# EAGLE board WiFiLedBoard_multi (EAGLE 6.1)
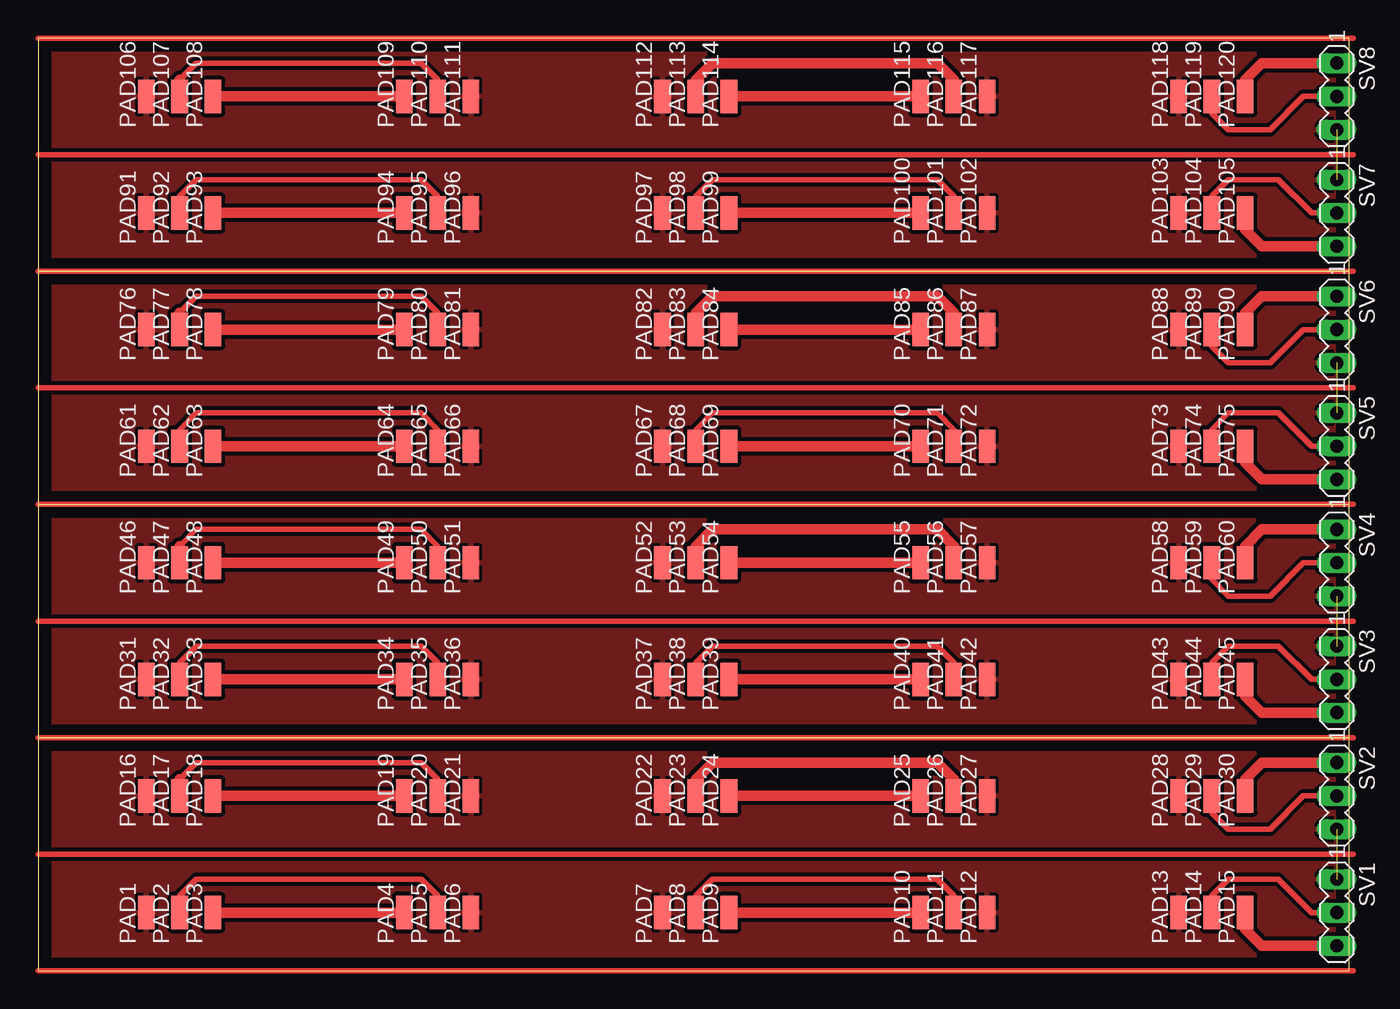
[diagram p0: board, top side]

Size 100 x 71.11 mm. Coordinates in mm from the lower left corner, seen from the top.
Outline: 0,0 100,0 100,17.77 0,17.77 0,0
Outline: 0,17.78 100,17.78 100,35.55 0,35.55 0,17.78
Outline: 0,35.56 100,35.56 100,53.33 0,53.33 0,35.56
Outline: 0,53.34 100,53.34 100,71.11 0,71.11 0,53.34
Copper layers (1*16): Top 0.035mm / dielectric 1.5mm / Bottom 0.035mm
Design rules: minimum track width 10mil, minimum drill 24mil, track to track 12mil, track to pad 12mil, pad to pad 8mil, via to via 8mil, smd to smd 8mil, copper to edge 40mil, drill to drill 8mil, minimum pad ring 10mil, minimum via ring 8mil, stop-mask expansion 4mil, vias tented up to drill 0mil, thermal gap 10mil

## Footprints (pad centres in the part's own frame; a part is rotated, then mirrored left to right if it is on the bottom)
SMD1,27-2,54 = smd 1.27 x 2.54: 1 0,0
MA03-1 = drill 1.016 long: 1 -2.54,0; 2 0,0; 3 2.54,0

## Placement (x,y rotation side)
PAD1  [SMD1,27-2,54]  8.26,4.45 0 top
PAD2  [SMD1,27-2,54]  10.79,4.45 0 top
PAD3  [SMD1,27-2,54]  13.34,4.45 0 top
PAD4  [SMD1,27-2,54]  27.94,4.45 0 top
PAD5  [SMD1,27-2,54]  30.48,4.45 0 top
PAD6  [SMD1,27-2,54]  33.02,4.45 0 top
PAD7  [SMD1,27-2,54]  47.62,4.45 0 top
PAD8  [SMD1,27-2,54]  50.16,4.45 0 top
PAD9  [SMD1,27-2,54]  52.7,4.45 0 top
PAD10  [SMD1,27-2,54]  67.31,4.45 0 top
PAD11  [SMD1,27-2,54]  69.85,4.45 0 top
PAD12  [SMD1,27-2,54]  72.39,4.45 0 top
PAD13  [SMD1,27-2,54]  87,4.45 0 top
PAD14  [SMD1,27-2,54]  89.53,4.45 0 top
PAD15  [SMD1,27-2,54]  92.08,4.45 0 top
PAD16  [SMD1,27-2,54]  8.26,13.34 0 top
PAD17  [SMD1,27-2,54]  10.79,13.34 0 top
PAD18  [SMD1,27-2,54]  13.34,13.34 0 top
PAD19  [SMD1,27-2,54]  27.94,13.34 0 top
PAD20  [SMD1,27-2,54]  30.48,13.34 0 top
PAD21  [SMD1,27-2,54]  33.02,13.34 0 top
PAD22  [SMD1,27-2,54]  47.62,13.34 0 top
PAD23  [SMD1,27-2,54]  50.16,13.34 0 top
PAD24  [SMD1,27-2,54]  52.7,13.34 0 top
PAD25  [SMD1,27-2,54]  67.31,13.34 0 top
PAD26  [SMD1,27-2,54]  69.85,13.34 0 top
PAD27  [SMD1,27-2,54]  72.39,13.34 0 top
PAD28  [SMD1,27-2,54]  87,13.34 0 top
PAD29  [SMD1,27-2,54]  89.53,13.34 0 top
PAD30  [SMD1,27-2,54]  92.08,13.34 0 top
PAD31  [SMD1,27-2,54]  8.26,22.23 0 top
PAD32  [SMD1,27-2,54]  10.79,22.23 0 top
PAD33  [SMD1,27-2,54]  13.34,22.23 0 top
PAD34  [SMD1,27-2,54]  27.94,22.23 0 top
PAD35  [SMD1,27-2,54]  30.48,22.23 0 top
PAD36  [SMD1,27-2,54]  33.02,22.23 0 top
PAD37  [SMD1,27-2,54]  47.62,22.23 0 top
PAD38  [SMD1,27-2,54]  50.16,22.23 0 top
PAD39  [SMD1,27-2,54]  52.7,22.23 0 top
PAD40  [SMD1,27-2,54]  67.31,22.23 0 top
PAD41  [SMD1,27-2,54]  69.85,22.23 0 top
PAD42  [SMD1,27-2,54]  72.39,22.23 0 top
PAD43  [SMD1,27-2,54]  87,22.23 0 top
PAD44  [SMD1,27-2,54]  89.53,22.23 0 top
PAD45  [SMD1,27-2,54]  92.08,22.23 0 top
PAD46  [SMD1,27-2,54]  8.26,31.11 0 top
PAD47  [SMD1,27-2,54]  10.79,31.11 0 top
PAD48  [SMD1,27-2,54]  13.34,31.11 0 top
PAD49  [SMD1,27-2,54]  27.94,31.11 0 top
PAD50  [SMD1,27-2,54]  30.48,31.11 0 top
PAD51  [SMD1,27-2,54]  33.02,31.11 0 top
PAD52  [SMD1,27-2,54]  47.62,31.11 0 top
PAD53  [SMD1,27-2,54]  50.16,31.11 0 top
PAD54  [SMD1,27-2,54]  52.7,31.11 0 top
PAD55  [SMD1,27-2,54]  67.31,31.11 0 top
PAD56  [SMD1,27-2,54]  69.85,31.11 0 top
PAD57  [SMD1,27-2,54]  72.39,31.11 0 top
PAD58  [SMD1,27-2,54]  87,31.11 0 top
PAD59  [SMD1,27-2,54]  89.53,31.11 0 top
PAD60  [SMD1,27-2,54]  92.08,31.11 0 top
PAD61  [SMD1,27-2,54]  8.26,40.01 0 top
PAD62  [SMD1,27-2,54]  10.79,40.01 0 top
PAD63  [SMD1,27-2,54]  13.34,40.01 0 top
PAD64  [SMD1,27-2,54]  27.94,40.01 0 top
PAD65  [SMD1,27-2,54]  30.48,40.01 0 top
PAD66  [SMD1,27-2,54]  33.02,40.01 0 top
PAD67  [SMD1,27-2,54]  47.62,40.01 0 top
PAD68  [SMD1,27-2,54]  50.16,40.01 0 top
PAD69  [SMD1,27-2,54]  52.7,40.01 0 top
PAD70  [SMD1,27-2,54]  67.31,40.01 0 top
PAD71  [SMD1,27-2,54]  69.85,40.01 0 top
PAD72  [SMD1,27-2,54]  72.39,40.01 0 top
PAD73  [SMD1,27-2,54]  87,40.01 0 top
PAD74  [SMD1,27-2,54]  89.53,40.01 0 top
PAD75  [SMD1,27-2,54]  92.08,40.01 0 top
PAD76  [SMD1,27-2,54]  8.26,48.9 0 top
PAD77  [SMD1,27-2,54]  10.79,48.9 0 top
PAD78  [SMD1,27-2,54]  13.34,48.9 0 top
PAD79  [SMD1,27-2,54]  27.94,48.9 0 top
PAD80  [SMD1,27-2,54]  30.48,48.9 0 top
PAD81  [SMD1,27-2,54]  33.02,48.9 0 top
PAD82  [SMD1,27-2,54]  47.62,48.9 0 top
PAD83  [SMD1,27-2,54]  50.16,48.9 0 top
PAD84  [SMD1,27-2,54]  52.7,48.9 0 top
PAD85  [SMD1,27-2,54]  67.31,48.9 0 top
PAD86  [SMD1,27-2,54]  69.85,48.9 0 top
PAD87  [SMD1,27-2,54]  72.39,48.9 0 top
PAD88  [SMD1,27-2,54]  87,48.9 0 top
PAD89  [SMD1,27-2,54]  89.53,48.9 0 top
PAD90  [SMD1,27-2,54]  92.08,48.9 0 top
PAD91  [SMD1,27-2,54]  8.26,57.78 0 top
PAD92  [SMD1,27-2,54]  10.79,57.78 0 top
PAD93  [SMD1,27-2,54]  13.34,57.78 0 top
PAD94  [SMD1,27-2,54]  27.94,57.78 0 top
PAD95  [SMD1,27-2,54]  30.48,57.78 0 top
PAD96  [SMD1,27-2,54]  33.02,57.78 0 top
PAD97  [SMD1,27-2,54]  47.62,57.78 0 top
PAD98  [SMD1,27-2,54]  50.16,57.78 0 top
PAD99  [SMD1,27-2,54]  52.7,57.78 0 top
PAD100  [SMD1,27-2,54]  67.31,57.78 0 top
PAD101  [SMD1,27-2,54]  69.85,57.78 0 top
PAD102  [SMD1,27-2,54]  72.39,57.78 0 top
PAD103  [SMD1,27-2,54]  87,57.78 0 top
PAD104  [SMD1,27-2,54]  89.53,57.78 0 top
PAD105  [SMD1,27-2,54]  92.08,57.78 0 top
PAD106  [SMD1,27-2,54]  8.26,66.67 0 top
PAD107  [SMD1,27-2,54]  10.79,66.67 0 top
PAD108  [SMD1,27-2,54]  13.34,66.67 0 top
PAD109  [SMD1,27-2,54]  27.94,66.67 0 top
PAD110  [SMD1,27-2,54]  30.48,66.67 0 top
PAD111  [SMD1,27-2,54]  33.02,66.67 0 top
PAD112  [SMD1,27-2,54]  47.62,66.67 0 top
PAD113  [SMD1,27-2,54]  50.16,66.67 0 top
PAD114  [SMD1,27-2,54]  52.7,66.67 0 top
PAD115  [SMD1,27-2,54]  67.31,66.67 0 top
PAD116  [SMD1,27-2,54]  69.85,66.67 0 top
PAD117  [SMD1,27-2,54]  72.39,66.67 0 top
PAD118  [SMD1,27-2,54]  87,66.67 0 top
PAD119  [SMD1,27-2,54]  89.53,66.67 0 top
PAD120  [SMD1,27-2,54]  92.08,66.67 0 top
SV1  [MA03-1]  99.06,4.45 270 top
SV2  [MA03-1]  99.06,13.34 270 top
SV3  [MA03-1]  99.06,22.23 270 top
SV4  [MA03-1]  99.06,31.11 270 top
SV5  [MA03-1]  99.06,40.01 270 top
SV6  [MA03-1]  99.06,48.9 270 top
SV7  [MA03-1]  99.06,57.78 270 top
SV8  [MA03-1]  99.06,66.67 270 top

## Library data of the parts
PAD1-PAD120 = wirepad
SV1-SV8 = con-lstb; OC_FARNELL: unknown; OC_NEWARK: unknown

## Nets
GND: PAD1.1 PAD6.1 PAD7.1 PAD12.1 PAD13.1 PAD16.1 PAD21.1 PAD22.1 PAD27.1 PAD28.1 SV1.1 SV2.3
GND1: PAD31.1 PAD36.1 PAD37.1 PAD42.1 PAD43.1 PAD46.1 PAD51.1 PAD52.1 PAD57.1 PAD58.1 SV3.1 SV4.3
GND2: PAD61.1 PAD66.1 PAD67.1 PAD72.1 PAD73.1 PAD76.1 PAD81.1 PAD82.1 PAD87.1 PAD88.1 SV5.1 SV6.3
GND3: PAD91.1 PAD96.1 PAD97.1 PAD102.1 PAD103.1 PAD106.1 PAD111.1 PAD112.1 PAD117.1 PAD118.1 SV7.1 SV8.3
N$1: PAD3.1 PAD4.1
N$2: PAD2.1 PAD5.1
N$4: PAD9.1 PAD10.1
N$5: PAD8.1 PAD11.1
N$7: PAD14.1 SV1.2
N$8: PAD29.1 SV2.2
N$9: PAD30.1 SV2.1
N$10: PAD18.1 PAD19.1
N$11: PAD17.1 PAD20.1
N$12: PAD33.1 PAD34.1
N$13: PAD24.1 PAD25.1
N$14: PAD23.1 PAD26.1
N$15: PAD32.1 PAD35.1
N$16: PAD39.1 PAD40.1
N$17: PAD15.1 SV1.3
N$18: PAD38.1 PAD41.1
N$20: PAD48.1 PAD49.1
N$21: PAD47.1 PAD50.1
N$22: PAD54.1 PAD55.1
N$23: PAD53.1 PAD56.1
N$24: PAD44.1 SV3.2
N$25: PAD59.1 SV4.2
N$26: PAD60.1 SV4.1
N$27: PAD45.1 SV3.3
N$31: PAD63.1 PAD64.1
N$32: PAD62.1 PAD65.1
N$33: PAD69.1 PAD70.1
N$34: PAD68.1 PAD71.1
N$35: PAD78.1 PAD79.1
N$36: PAD77.1 PAD80.1
N$37: PAD84.1 PAD85.1
N$38: PAD83.1 PAD86.1
N$39: PAD74.1 SV5.2
N$40: PAD89.1 SV6.2
N$41: PAD90.1 SV6.1
N$42: PAD75.1 SV5.3
N$46: PAD93.1 PAD94.1
N$47: PAD92.1 PAD95.1
N$48: PAD99.1 PAD100.1
N$49: PAD98.1 PAD101.1
N$50: PAD108.1 PAD109.1
N$51: PAD107.1 PAD110.1
N$52: PAD114.1 PAD115.1
N$53: PAD113.1 PAD116.1
N$54: PAD104.1 SV7.2
N$55: PAD119.1 SV8.2
N$56: PAD120.1 SV8.1
N$57: PAD105.1 SV7.3

## Tracks (layer width: path | path; a pad name or v marks a point on that pad's centre or on a via)
GND  (1 unrouted)
  pour Top: 0,17.78 0,0 100.33,0 100.33,17.78
GND1  (1 unrouted)
  pour Top: 0,35.56 0,17.78 100.33,17.78 100.33,35.56
GND2  (1 unrouted)
  pour Top: 0,53.34 0,35.56 100.33,35.56 100.33,53.34
GND3  (1 unrouted)
  pour Top: 0,71.12 0,53.34 100.33,53.34 100.33,71.12
N$1
  Top 0.813: PAD3.1 PAD4.1
N$2
  Top 0.406: PAD2.1 10.79,5.71 12.06,6.99 29.21,6.99 30.48,5.71 PAD5.1
N$3
  Top 0.406: 0,17.78 100.33,17.78
N$4
  Top 0.813: PAD9.1 PAD10.1
N$5
  Top 0.406: PAD8.1 50.16,5.71 51.44,6.99 68.58,6.99 69.85,5.71 PAD11.1
N$6
  Top 0.406: 0,0 100.33,0
N$7
  Top 0.406: PAD14.1 89.53,5.71 90.81,6.99 94.61,6.99 97.16,4.45 SV1.2
N$8
  Top 0.406: PAD29.1 89.53,12.06 90.81,10.79 93.98,10.79 96.52,13.34 SV2.2
N$9
  Top 0.406: PAD30.1 92.08,14.61
  Top 0.813: 92.08,14.61 93.34,15.88 SV2.1
N$10
  Top 0.813: PAD18.1 PAD19.1
N$11
  Top 0.406: 10.79,14.61 12.06,15.88 29.21,15.88 30.48,14.61 PAD20.1
  Top 0.813: PAD17.1 10.79,14.61
N$12
  Top 0.813: PAD33.1 PAD34.1
N$13
  Top 0.813: PAD24.1 PAD25.1
N$14
  Top 0.406: PAD23.1 50.16,14.61 | 69.85,14.61 PAD26.1
  Top 0.813: 50.16,14.61 51.44,15.88 68.58,15.88 69.85,14.61
N$15
  Top 0.406: PAD32.1 10.79,23.5 12.06,24.77 29.21,24.77 30.48,23.5 PAD35.1
N$16
  Top 0.813: PAD39.1 PAD40.1
N$17
  Top 0.406: 92.08,3.17 PAD15.1
  Top 0.813: SV1.3 93.34,1.91 92.08,3.17
N$18
  Top 0.406: PAD38.1 50.16,23.5 51.44,24.77 68.58,24.77 69.85,23.5 PAD41.1
N$19
  Top 0.406: 0,8.89 100.33,8.89
N$20
  Top 0.813: PAD48.1 PAD49.1
N$21
  Top 0.406: 10.79,32.38 12.06,33.66 29.21,33.66 30.48,32.38 PAD50.1
  Top 0.813: PAD47.1 10.79,32.38
N$22
  Top 0.813: PAD54.1 PAD55.1
N$23
  Top 0.406: PAD53.1 50.16,32.38 | 69.85,32.38 PAD56.1
  Top 0.813: 50.16,32.38 51.44,33.66 68.58,33.66 69.85,32.38
N$24
  Top 0.406: PAD44.1 89.53,23.5 90.81,24.77 94.61,24.77 97.16,22.23 SV3.2
N$25
  Top 0.406: PAD59.1 89.53,29.84 90.81,28.57 93.98,28.57 96.52,31.11 SV4.2
N$26
  Top 0.406: PAD60.1 92.08,32.38
  Top 0.813: 92.08,32.38 93.34,33.66 SV4.1
N$27
  Top 0.406: 92.08,20.95 PAD45.1
  Top 0.813: SV3.3 93.34,19.68 92.08,20.95
N$28
  Top 0.406: 0,26.67 100.33,26.67
N$29
  Top 0.406: 0,35.56 100.33,35.56
N$30
  Top 0.406: 0,17.78 100.33,17.78
N$31
  Top 0.813: PAD63.1 PAD64.1
N$32
  Top 0.406: PAD62.1 10.79,41.27 12.06,42.55 29.21,42.55 30.48,41.27 PAD65.1
N$33
  Top 0.813: PAD69.1 PAD70.1
N$34
  Top 0.406: PAD68.1 50.16,41.27 51.44,42.55 68.58,42.55 69.85,41.27 PAD71.1
N$35
  Top 0.813: PAD78.1 PAD79.1
N$36
  Top 0.406: 10.79,50.16 12.06,51.44 29.21,51.44 30.48,50.16 PAD80.1
  Top 0.813: PAD77.1 10.79,50.16
N$37
  Top 0.813: PAD84.1 PAD85.1
N$38
  Top 0.406: PAD83.1 50.16,50.16 | 69.85,50.16 PAD86.1
  Top 0.813: 50.16,50.16 51.44,51.44 68.58,51.44 69.85,50.16
N$39
  Top 0.406: PAD74.1 89.53,41.27 90.81,42.55 94.61,42.55 97.16,40.01 SV5.2
N$40
  Top 0.406: PAD89.1 89.53,47.62 90.81,46.35 93.98,46.35 96.52,48.9 SV6.2
N$41
  Top 0.406: PAD90.1 92.08,50.16
  Top 0.813: 92.08,50.16 93.34,51.44 SV6.1
N$42
  Top 0.406: 92.08,38.73 PAD75.1
  Top 0.813: SV5.3 93.34,37.47 92.08,38.73
N$43
  Top 0.406: 0,44.45 100.33,44.45
N$44
  Top 0.406: 0,53.34 100.33,53.34
N$45
  Top 0.406: 0,35.56 100.33,35.56
N$46
  Top 0.813: PAD93.1 PAD94.1
N$47
  Top 0.406: PAD92.1 10.79,59.05 12.06,60.33 29.21,60.33 30.48,59.05 PAD95.1
N$48
  Top 0.813: PAD99.1 PAD100.1
N$49
  Top 0.406: PAD98.1 50.16,59.05 51.44,60.33 68.58,60.33 69.85,59.05 PAD101.1
N$50
  Top 0.813: PAD108.1 PAD109.1
N$51
  Top 0.406: 10.79,67.94 12.06,69.22 29.21,69.22 30.48,67.94 PAD110.1
  Top 0.813: PAD107.1 10.79,67.94
N$52
  Top 0.813: PAD114.1 PAD115.1
N$53
  Top 0.406: PAD113.1 50.16,67.94 | 69.85,67.94 PAD116.1
  Top 0.813: 50.16,67.94 51.44,69.22 68.58,69.22 69.85,67.94
N$54
  Top 0.406: PAD104.1 89.53,59.05 90.81,60.33 94.61,60.33 97.16,57.78 SV7.2
N$55
  Top 0.406: PAD119.1 89.53,65.41 90.81,64.14 93.98,64.14 96.52,66.67 SV8.2
N$56
  Top 0.406: PAD120.1 92.08,67.94
  Top 0.813: 92.08,67.94 93.34,69.22 SV8.1
N$57
  Top 0.406: 92.08,56.52 PAD105.1
  Top 0.813: SV7.3 93.34,55.24 92.08,56.52
N$58
  Top 0.406: 0,62.23 100.33,62.23
N$59
  Top 0.406: 0,71.12 100.33,71.12
N$60
  Top 0.406: 0,53.34 100.33,53.34